# Altium PCB Motherboard.PcbDoc (part 1 of 2)
Units mm, origin at the board's own origin, x right, y up, seen from the top; angles counter-clockwise.
Board outline 131 x 71 mm, 4 copper layers (Top Layer, Power, Ground, Bottom Layer), stack 0.603 mm thick; 135 components, 79 nets, 354 pads, 162 vias.
Unrouted connection lines stored in the file: 81.
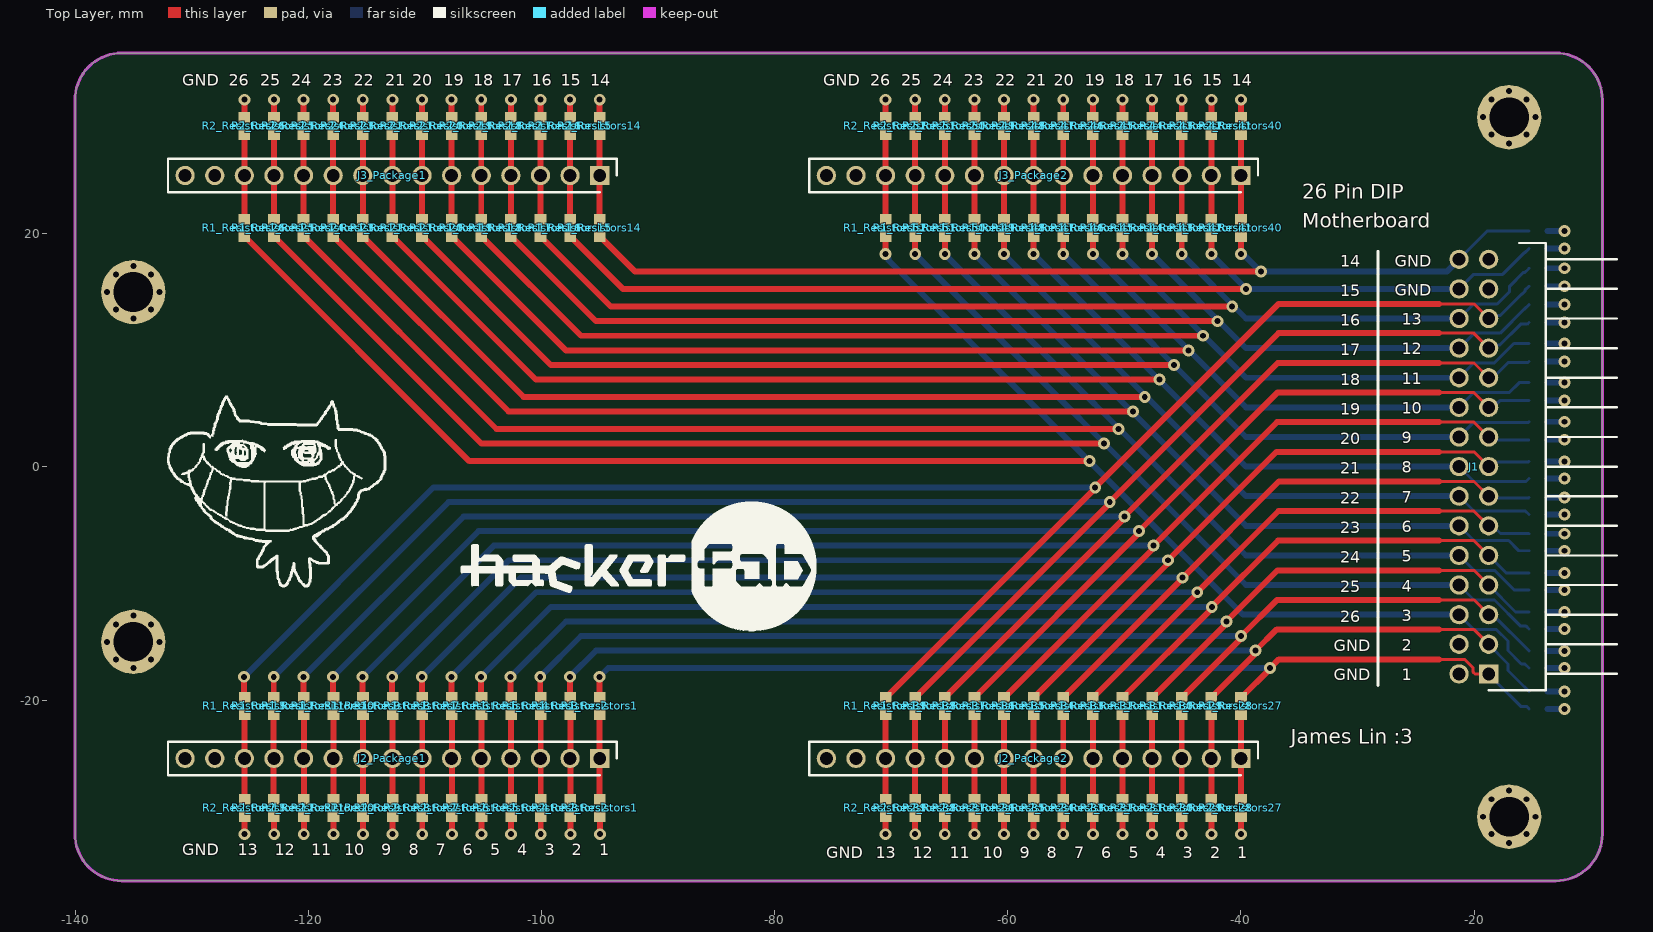
[diagram p0: Top Layer view]
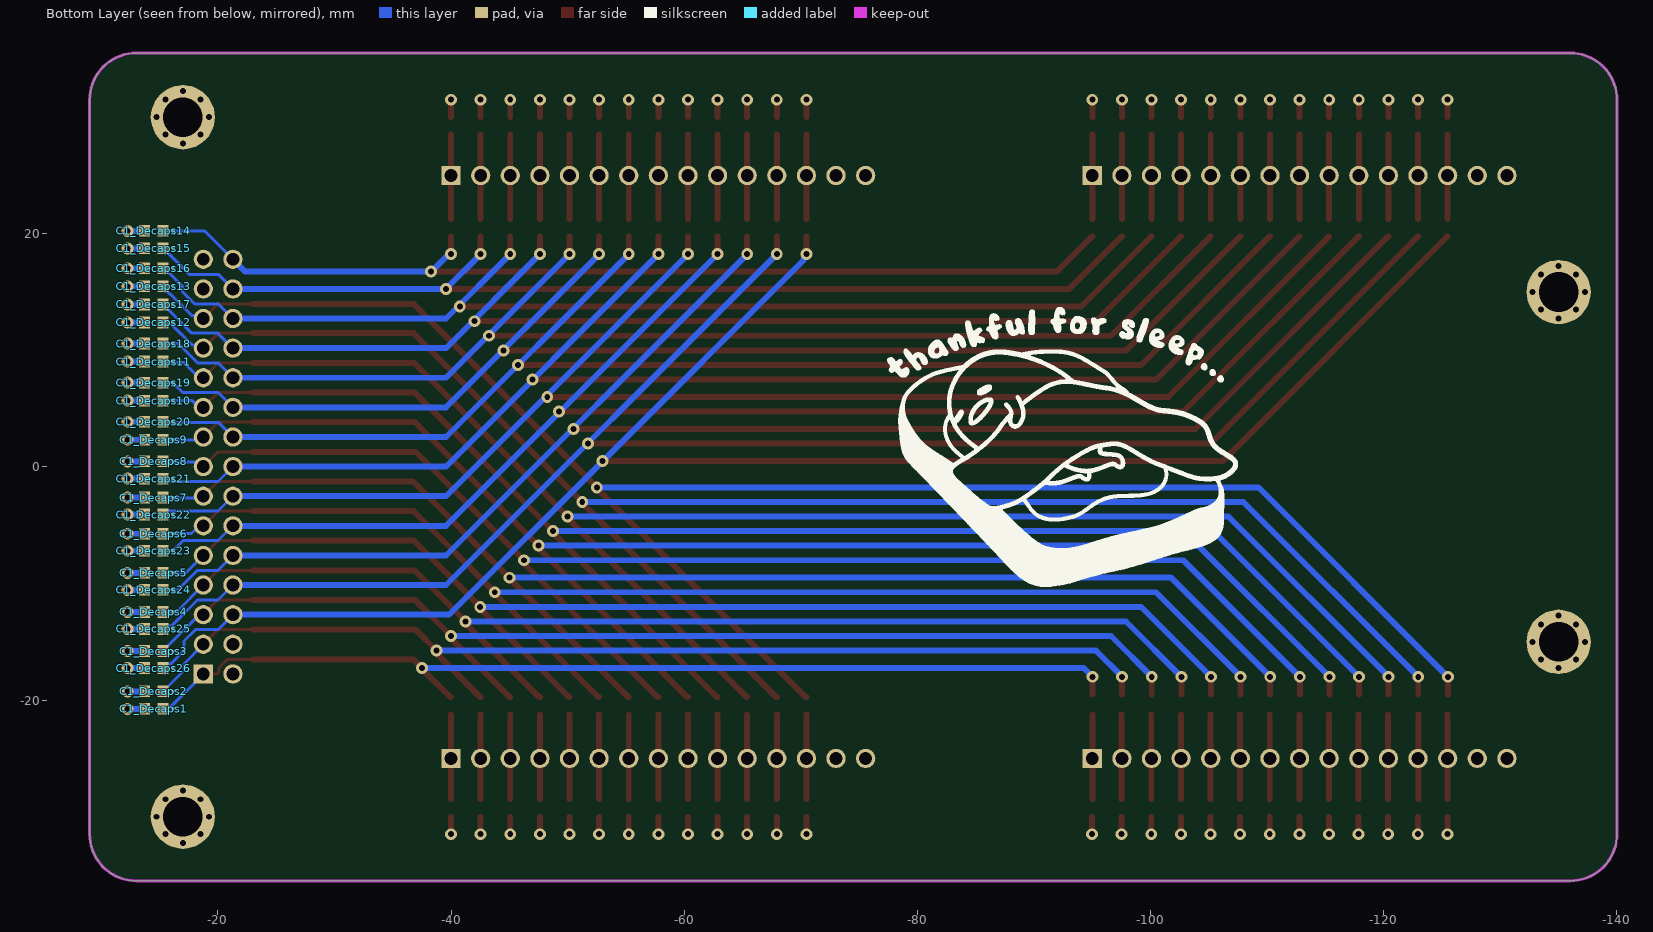
[diagram p1: Bottom Layer view, seen from below]
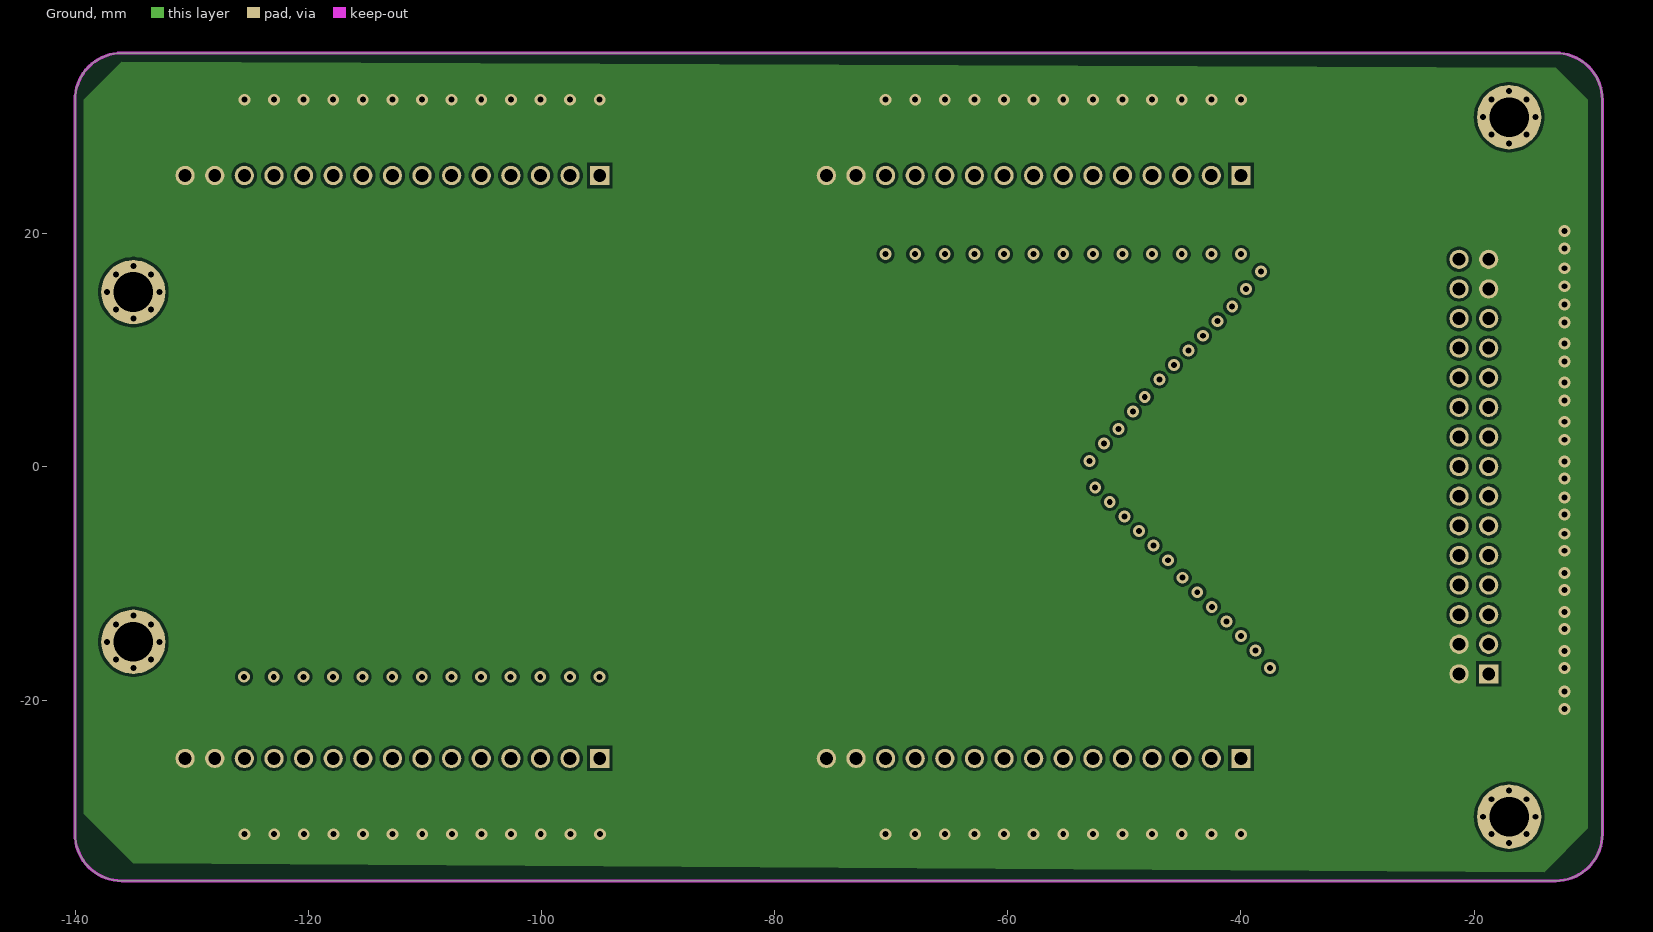
[diagram p2: Ground]
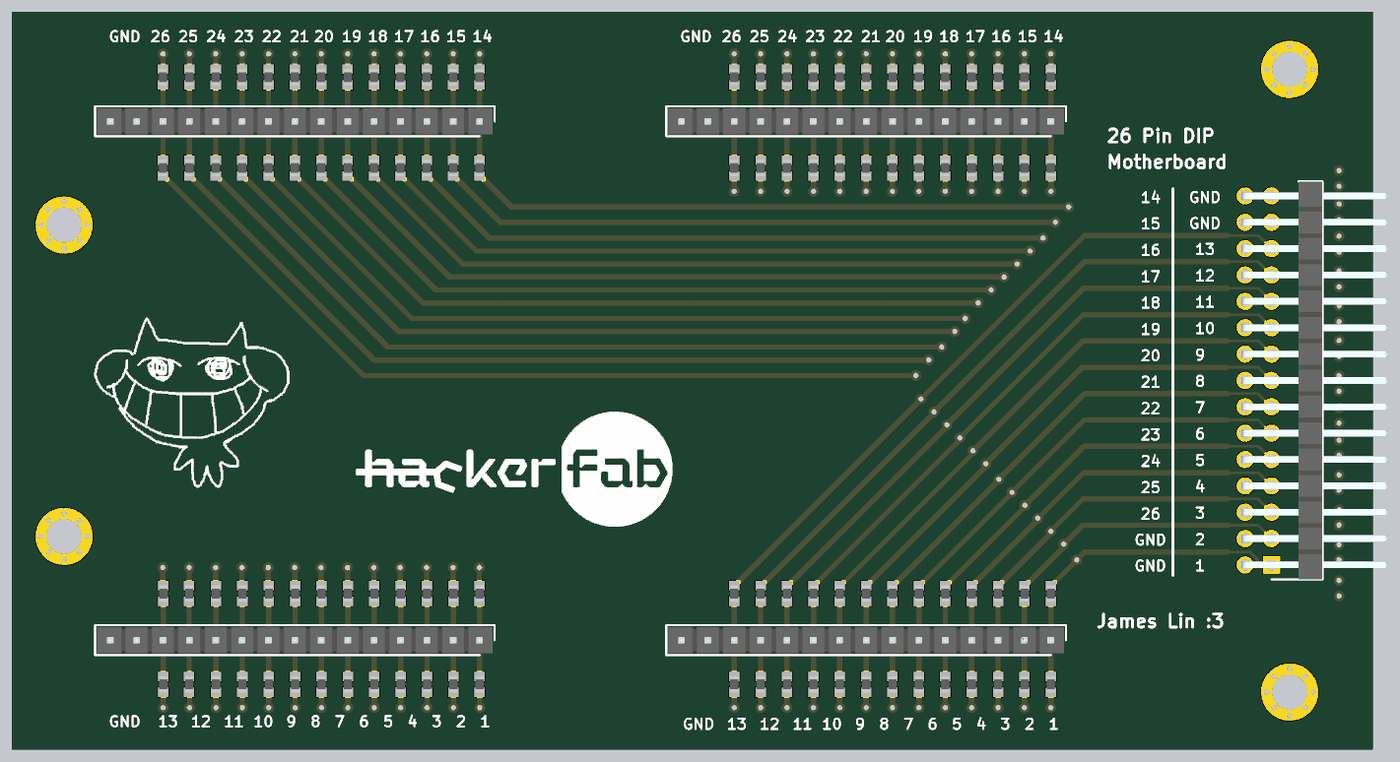
[diagram p4: 3D render of the assembled board from above, using the file's embedded part models]
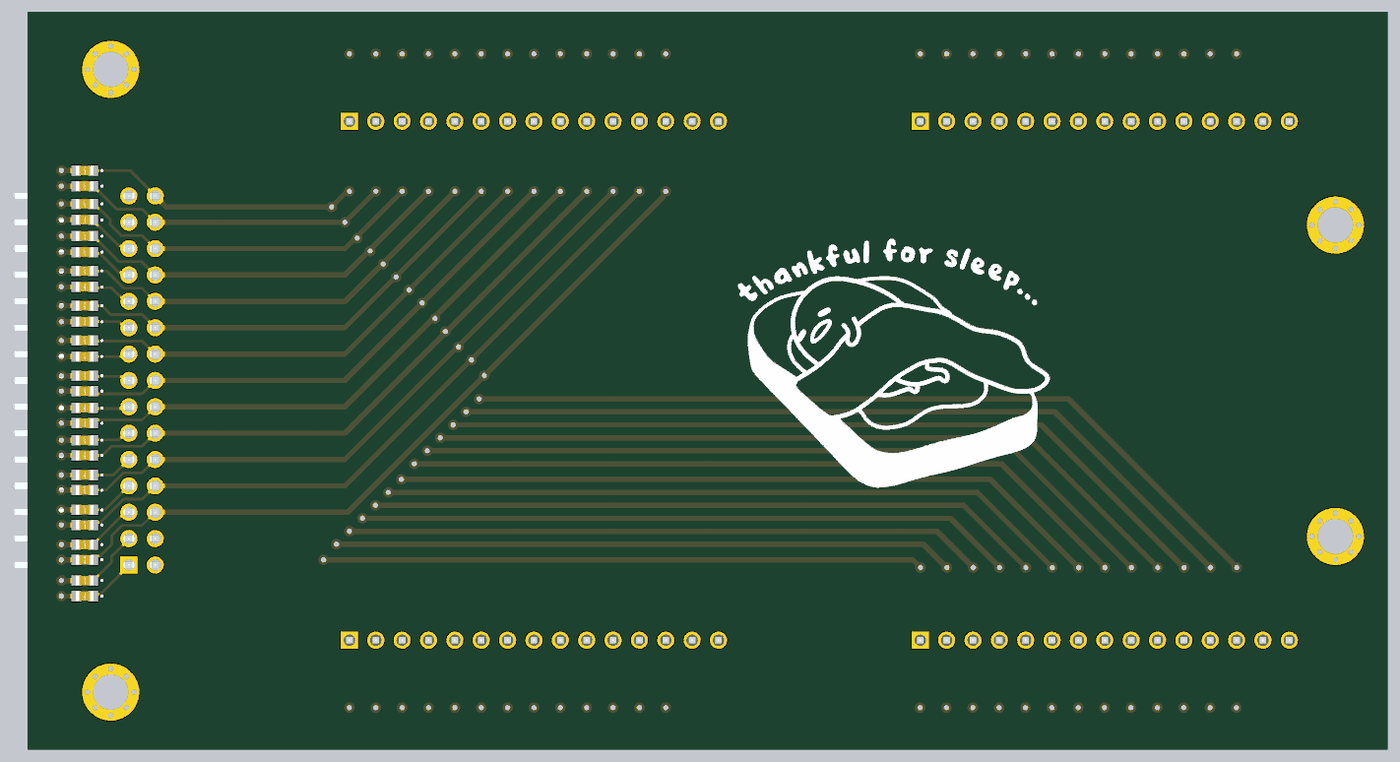
[diagram p5: 3D render of the assembled board from below, using the file's embedded part models]

## Layer stack, top to bottom
Top Solder: solder mask 0.0102, Solder Resist, Dk 3.5
Top Layer: signal copper 0.0356
Dielectric 2: prepreg 0.0711, PP-006, Dk 4.1
Power: signal copper 0.035
Dielectric 1: dielectric 0.32, FR-4, Dk 4.8
Ground: signal copper 0.035
Dielectric 3: prepreg 0.0711, PP-006, Dk 4.1
Bottom Layer: signal copper 0.0356
Bottom Solder: solder mask 0.0102, Solder Resist, Dk 3.5

## Board outline
-136,-35.5 cw(c-136,-31.5) -140,-31.5 -140,31.5 cw(c-136,31.5) -136,35.5 -13,35.5 cw(c-13,31.5) -9,31.5 -9,-31.5 cw(c-13,-31.5) -13,-35.5

## Design rules (kind name [scope] priority, off if disabled: settings)
Clearance [All] p1: gap=0.254 ignorepadtopadclearanceinfootprint=FALSE
PolygonConnect [All] p1: connectstyle=Direct reliefconductorwidth=0.254 reliefentries=4 polygonreliefangle="90 Angle" airgapwidth=0.254
RoomDefinition Package1 [InComponentClass('Package1')] p1: confinementstyle=ConfineIn formatcopy=TRUE lockcomponents=TRUE outline -132.75,-27.18 -93,-27.18 -93,27.07 -132.75,27.07
RoomDefinition Resistors52 [InComponentClass('Resistors52')] p2: confinementstyle=ConfineIn formatcopy=TRUE lockcomponents=FALSE outline -69.73,31.18 -71.23,31.18 -71.23,18.68 -69.73,18.68
RoomDefinition Resistors48 [InComponentClass('Resistors48')] p3: confinementstyle=ConfineIn formatcopy=TRUE lockcomponents=FALSE outline -59.57,31.18 -61.07,31.18 -61.07,18.68 -59.57,18.68
RoomDefinition Resistors26 [InComponentClass('Resistors26')] p4: confinementstyle=ConfineIn formatcopy=FALSE lockcomponents=FALSE outline -124.73,31.18 -126.23,31.18 -126.23,18.68 -124.73,18.68
RoomDefinition Resistors25 [InComponentClass('Resistors25')] p5: confinementstyle=ConfineIn formatcopy=FALSE lockcomponents=FALSE outline -122.19,31.18 -123.69,31.18 -123.69,18.68 -122.19,18.68
RoomDefinition Resistors24 [InComponentClass('Resistors24')] p6: confinementstyle=ConfineIn formatcopy=FALSE lockcomponents=FALSE outline -119.65,31.18 -121.15,31.18 -121.15,18.68 -119.65,18.68
RoomDefinition Resistors23 [InComponentClass('Resistors23')] p7: confinementstyle=ConfineIn formatcopy=FALSE lockcomponents=FALSE outline -117.11,31.18 -118.61,31.18 -118.61,18.68 -117.11,18.68
RoomDefinition Resistors22 [InComponentClass('Resistors22')] p8: confinementstyle=ConfineIn formatcopy=FALSE lockcomponents=FALSE outline -114.57,31.18 -116.07,31.18 -116.07,18.68 -114.57,18.68
RoomDefinition Resistors21 [InComponentClass('Resistors21')] p9: confinementstyle=ConfineIn formatcopy=FALSE lockcomponents=FALSE outline -112.03,31.18 -113.53,31.18 -113.53,18.68 -112.03,18.68
RoomDefinition Resistors20 [InComponentClass('Resistors20')] p10: confinementstyle=ConfineIn formatcopy=FALSE lockcomponents=FALSE outline -109.49,31.18 -110.99,31.18 -110.99,18.68 -109.49,18.68
RoomDefinition Resistors19 [InComponentClass('Resistors19')] p11: confinementstyle=ConfineIn formatcopy=FALSE lockcomponents=FALSE outline -106.95,31.18 -108.45,31.18 -108.45,18.68 -106.95,18.68
RoomDefinition Resistors18 [InComponentClass('Resistors18')] p12: confinementstyle=ConfineIn formatcopy=FALSE lockcomponents=FALSE outline -104.41,31.18 -105.91,31.18 -105.91,18.68 -104.41,18.68
RoomDefinition Resistors17 [InComponentClass('Resistors17')] p13: confinementstyle=ConfineIn formatcopy=FALSE lockcomponents=FALSE outline -101.87,31.18 -103.37,31.18 -103.37,18.68 -101.87,18.68
RoomDefinition Resistors16 [InComponentClass('Resistors16')] p14: confinementstyle=ConfineIn formatcopy=FALSE lockcomponents=FALSE outline -99.33,31.18 -100.83,31.18 -100.83,18.68 -99.33,18.68
RoomDefinition Resistors15 [InComponentClass('Resistors15')] p15: confinementstyle=ConfineIn formatcopy=FALSE lockcomponents=FALSE outline -96.79,31.18 -98.29,31.18 -98.29,18.68 -96.79,18.68
RoomDefinition Resistors14 [InComponentClass('Resistors14')] p16: confinementstyle=ConfineIn formatcopy=FALSE lockcomponents=FALSE outline -94.25,31.18 -95.75,31.18 -95.75,18.68 -94.25,18.68
RoomDefinition Resistors2 [InComponentClass('Resistors2')] p17: confinementstyle=ConfineIn formatcopy=FALSE lockcomponents=FALSE outline -98.269,-31.18 -96.769,-31.18 -96.769,-18.68 -98.269,-18.68
RoomDefinition Resistors3 [InComponentClass('Resistors3')] p18: confinementstyle=ConfineIn formatcopy=FALSE lockcomponents=FALSE outline -100.809,-31.18 -99.309,-31.18 -99.309,-18.68 -100.809,-18.68
RoomDefinition Resistors4 [InComponentClass('Resistors4')] p19: confinementstyle=ConfineIn formatcopy=FALSE lockcomponents=FALSE outline -103.349,-31.18 -101.849,-31.18 -101.849,-18.68 -103.349,-18.68
RoomDefinition Resistors5 [InComponentClass('Resistors5')] p20: confinementstyle=ConfineIn formatcopy=FALSE lockcomponents=FALSE outline -105.889,-31.18 -104.389,-31.18 -104.389,-18.68 -105.889,-18.68
RoomDefinition Resistors6 [InComponentClass('Resistors6')] p21: confinementstyle=ConfineIn formatcopy=FALSE lockcomponents=FALSE outline -108.429,-31.18 -106.929,-31.18 -106.929,-18.68 -108.429,-18.68
RoomDefinition Resistors11 [InComponentClass('Resistors11')] p22: confinementstyle=ConfineIn formatcopy=FALSE lockcomponents=FALSE outline -121.129,-31.18 -119.629,-31.18 -119.629,-18.68 -121.129,-18.68
RoomDefinition Resistors13 [InComponentClass('Resistors13')] p23: confinementstyle=ConfineIn formatcopy=FALSE lockcomponents=FALSE outline -126.209,-31.18 -124.709,-31.18 -124.709,-18.68 -126.209,-18.68
RoomDefinition Resistors7 [InComponentClass('Resistors7')] p24: confinementstyle=ConfineIn formatcopy=FALSE lockcomponents=FALSE outline -110.969,-31.18 -109.469,-31.18 -109.469,-18.68 -110.969,-18.68
RoomDefinition Resistors8 [InComponentClass('Resistors8')] p25: confinementstyle=ConfineIn formatcopy=FALSE lockcomponents=FALSE outline -113.509,-31.18 -112.009,-31.18 -112.009,-18.68 -113.509,-18.68
RoomDefinition Resistors9 [InComponentClass('Resistors9')] p26: confinementstyle=ConfineIn formatcopy=FALSE lockcomponents=FALSE outline -116.049,-31.18 -114.549,-31.18 -114.549,-18.68 -116.049,-18.68
RoomDefinition Resistors10 [InComponentClass('Resistors10')] p27: confinementstyle=ConfineIn formatcopy=FALSE lockcomponents=FALSE outline -118.589,-31.18 -117.089,-31.18 -117.089,-18.68 -118.589,-18.68
RoomDefinition Resistors12 [InComponentClass('Resistors12')] p28: confinementstyle=ConfineIn formatcopy=FALSE lockcomponents=FALSE outline -123.717,-31.18 -122.217,-31.18 -122.217,-18.68 -123.717,-18.68
RoomDefinition Resistors1 [InComponentClass('Resistors1')] p29: confinementstyle=ConfineIn formatcopy=FALSE lockcomponents=FALSE outline -95.75,-31.18 -94.25,-31.18 -94.25,-18.68 -95.75,-18.68
RoomDefinition Resistors51 [InComponentClass('Resistors51')] p30: confinementstyle=ConfineIn formatcopy=TRUE lockcomponents=FALSE outline -67.19,31.18 -68.69,31.18 -68.69,18.68 -67.19,18.68
RoomDefinition Resistors50 [InComponentClass('Resistors50')] p31: confinementstyle=ConfineIn formatcopy=TRUE lockcomponents=FALSE outline -64.65,31.18 -66.15,31.18 -66.15,18.68 -64.65,18.68
RoomDefinition Resistors49 [InComponentClass('Resistors49')] p32: confinementstyle=ConfineIn formatcopy=TRUE lockcomponents=FALSE outline -62.11,31.18 -63.61,31.18 -63.61,18.68 -62.11,18.68
RoomDefinition Resistors47 [InComponentClass('Resistors47')] p33: confinementstyle=ConfineIn formatcopy=TRUE lockcomponents=FALSE outline -57.03,31.18 -58.53,31.18 -58.53,18.68 -57.03,18.68
RoomDefinition Resistors46 [InComponentClass('Resistors46')] p34: confinementstyle=ConfineIn formatcopy=TRUE lockcomponents=FALSE outline -54.49,31.18 -55.99,31.18 -55.99,18.68 -54.49,18.68
RoomDefinition Resistors45 [InComponentClass('Resistors45')] p35: confinementstyle=ConfineIn formatcopy=TRUE lockcomponents=FALSE outline -51.95,31.18 -53.45,31.18 -53.45,18.68 -51.95,18.68
RoomDefinition Resistors44 [InComponentClass('Resistors44')] p36: confinementstyle=ConfineIn formatcopy=TRUE lockcomponents=FALSE outline -49.41,31.18 -50.91,31.18 -50.91,18.68 -49.41,18.68
RoomDefinition Resistors43 [InComponentClass('Resistors43')] p37: confinementstyle=ConfineIn formatcopy=TRUE lockcomponents=FALSE outline -46.87,31.18 -48.37,31.18 -48.37,18.68 -46.87,18.68
RoomDefinition Resistors42 [InComponentClass('Resistors42')] p38: confinementstyle=ConfineIn formatcopy=TRUE lockcomponents=FALSE outline -44.33,31.18 -45.83,31.18 -45.83,18.68 -44.33,18.68
RoomDefinition Resistors41 [InComponentClass('Resistors41')] p39: confinementstyle=ConfineIn formatcopy=TRUE lockcomponents=FALSE outline -41.79,31.18 -43.29,31.18 -43.29,18.68 -41.79,18.68
RoomDefinition Resistors40 [InComponentClass('Resistors40')] p40: confinementstyle=ConfineIn formatcopy=FALSE lockcomponents=FALSE outline -39.25,31.18 -40.75,31.18 -40.75,18.68 -39.25,18.68
RoomDefinition Resistors39 [InComponentClass('Resistors39')] p41: confinementstyle=ConfineIn formatcopy=FALSE lockcomponents=FALSE outline -71.23,-31.18 -69.73,-31.18 -69.73,-18.68 -71.23,-18.68
RoomDefinition Resistors38 [InComponentClass('Resistors38')] p42: confinementstyle=ConfineIn formatcopy=FALSE lockcomponents=FALSE outline -68.69,-31.18 -67.19,-31.18 -67.19,-18.68 -68.69,-18.68
RoomDefinition Resistors37 [InComponentClass('Resistors37')] p43: confinementstyle=ConfineIn formatcopy=FALSE lockcomponents=FALSE outline -66.15,-31.18 -64.65,-31.18 -64.65,-18.68 -66.15,-18.68
RoomDefinition Resistors36 [InComponentClass('Resistors36')] p44: confinementstyle=ConfineIn formatcopy=FALSE lockcomponents=FALSE outline -63.61,-31.18 -62.11,-31.18 -62.11,-18.68 -63.61,-18.68
RoomDefinition Resistors35 [InComponentClass('Resistors35')] p45: confinementstyle=ConfineIn formatcopy=FALSE lockcomponents=FALSE outline -61.07,-31.18 -59.57,-31.18 -59.57,-18.68 -61.07,-18.68
RoomDefinition Resistors34 [InComponentClass('Resistors34')] p46: confinementstyle=ConfineIn formatcopy=FALSE lockcomponents=FALSE outline -58.53,-31.18 -57.03,-31.18 -57.03,-18.68 -58.53,-18.68
RoomDefinition Resistors33 [InComponentClass('Resistors33')] p47: confinementstyle=ConfineIn formatcopy=FALSE lockcomponents=FALSE outline -55.99,-31.18 -54.49,-31.18 -54.49,-18.68 -55.99,-18.68
RoomDefinition Resistors32 [InComponentClass('Resistors32')] p48: confinementstyle=ConfineIn formatcopy=FALSE lockcomponents=FALSE outline -53.45,-31.18 -51.95,-31.18 -51.95,-18.68 -53.45,-18.68
RoomDefinition Resistors31 [InComponentClass('Resistors31')] p49: confinementstyle=ConfineIn formatcopy=FALSE lockcomponents=FALSE outline -50.91,-31.18 -49.41,-31.18 -49.41,-18.68 -50.91,-18.68
RoomDefinition Resistors30 [InComponentClass('Resistors30')] p50: confinementstyle=ConfineIn formatcopy=FALSE lockcomponents=FALSE outline -48.37,-31.18 -46.87,-31.18 -46.87,-18.68 -48.37,-18.68
RoomDefinition Resistors29 [InComponentClass('Resistors29')] p51: confinementstyle=ConfineIn formatcopy=FALSE lockcomponents=FALSE outline -45.83,-31.18 -44.33,-31.18 -44.33,-18.68 -45.83,-18.68
RoomDefinition Resistors28 [InComponentClass('Resistors28')] p52: confinementstyle=ConfineIn formatcopy=FALSE lockcomponents=FALSE outline -43.29,-31.18 -41.79,-31.18 -41.79,-18.68 -43.29,-18.68
RoomDefinition Resistors27 [InComponentClass('Resistors27')] p53: confinementstyle=ConfineIn formatcopy=FALSE lockcomponents=FALSE outline -40.75,-31.18 -39.25,-31.18 -39.25,-18.68 -40.75,-18.68
RoomDefinition Package2 [InComponentClass('Package2')] p54: confinementstyle=ConfineIn formatcopy=TRUE lockcomponents=TRUE outline -77.75,-27.18 -38,-27.18 -38,27.07 -77.75,27.07
RoutingVias [All] p1: holewidth=0.711 width=1.27 viastyle="Through Hole" minholewidth=0 minwidth=0 maxholewidth=15 maxwidth=15
SolderMaskExpansion [All] p1: expansion=0.102 istentingtop=FALSE
SupplyNets "Schematic Supply Nets" [InNet('GND')] p1: voltage=0.000
Width [All] p1: maxlimit=0.508 minlimit=0.254 preferedwidth=0.254
30 further rules are at their usual default settings.

## Classes and differential pairs
component class Resistors52: R1_Resistors52 R2_Resistors52
component class Resistors51: R1_Resistors51 R2_Resistors51
component class Resistors49: R1_Resistors49 R2_Resistors49
component class Resistors46: R1_Resistors46 R2_Resistors46
component class Resistors43: R1_Resistors43 R2_Resistors43
component class Resistors41: R1_Resistors41 R2_Resistors41
channel class Decaps: Decaps1 Decaps2 Decaps3 Decaps4 Decaps5 Decaps6 Decaps7 Decaps8 Decaps9 Decaps10 Decaps11 Decaps12 Decaps13 Decaps14 Decaps15 Decaps16 Decaps17 Decaps18 Decaps19 Decaps20 Decaps21 Decaps22 Decaps23 Decaps24 Decaps25 Decaps26
net class Decap_In[1..26]: Decap_In1 Decap_In2 Decap_In3 Decap_In4 Decap_In5 Decap_In6 Decap_In7 Decap_In8 Decap_In9 Decap_In10 Decap_In11 Decap_In12 Decap_In13 Decap_In14 Decap_In15 Decap_In16 Decap_In17 Decap_In18 Decap_In19 Decap_In20 Decap_In21 Decap_In22 Decap_In23 Decap_In24 Decap_In25 Decap_In26
component class Decaps26: C1_Decaps26
component class Decaps25: C1_Decaps25
component class Decaps24: C1_Decaps24
component class Decaps23: C1_Decaps23
component class Decaps22: C1_Decaps22
component class Decaps21: C1_Decaps21
component class Decaps20: C1_Decaps20
component class Decaps19: C1_Decaps19
component class Decaps18: C1_Decaps18
component class Decaps17: C1_Decaps17
component class Decaps16: C1_Decaps16
component class Decaps15: C1_Decaps15
component class Decaps14: C1_Decaps14
component class Decaps13: C1_Decaps13
component class Decaps12: C1_Decaps12
component class Decaps11: C1_Decaps11
component class Decaps10: C1_Decaps10
component class Decaps9: C1_Decaps9
component class Decaps8: C1_Decaps8
component class Decaps7: C1_Decaps7
component class Decaps6: C1_Decaps6
component class Decaps5: C1_Decaps5
component class Decaps4: C1_Decaps4
component class Decaps3: C1_Decaps3
component class Decaps2: C1_Decaps2
component class Decaps1: C1_Decaps1
component class Resistors6: R1_Resistors6 R2_Resistors6
component class Resistors5: R1_Resistors5 R2_Resistors5
component class Resistors4: R1_Resistors4 R2_Resistors4
component class Resistors3: R1_Resistors3 R2_Resistors3
component class Resistors2: R1_Resistors2 R2_Resistors2
component class Resistors1: R1_Resistors1 R2_Resistors1
channel class "Package Sockets": Package1 Package2
component class Resistors48: m R1_Resistors48 R2_Resistors48
component class Resistors47: m R1_Resistors47 R2_Resistors47
component class Resistors50: m R1_Resistors50 R2_Resistors50
component class Resistors45: m R1_Resistors45 R2_Resistors45
component class Resistors44: m R1_Resistors44 R2_Resistors44
component class Resistors39: m R1_Resistors39 R2_Resistors39
component class Resistors42: m R1_Resistors42 R2_Resistors42
component class Resistors40: m R1_Resistors40 R2_Resistors40
component class Resistors35: m R1_Resistors35 R2_Resistors35
component class Resistors38: m R1_Resistors38 R2_Resistors38
component class Resistors37: m R1_Resistors37 R2_Resistors37
component class Resistors36: m R1_Resistors36 R2_Resistors36
component class Resistors31: m R1_Resistors31 R2_Resistors31
component class Resistors30: m R1_Resistors30 R2_Resistors30
component class Resistors33: m R1_Resistors33 R2_Resistors33
component class Resistors28: m R1_Resistors28 R2_Resistors28
component class Resistors27: m R1_Resistors27 R2_Resistors27
component class Resistors34: m R1_Resistors34 R2_Resistors34
component class Resistors32: m R1_Resistors32 R2_Resistors32
component class Package2: J2_Package2 J3_Package2
component class Package1: J2_Package1 J3_Package1
channel class Resistors: Resistors1 Resistors2 Resistors3 Resistors4 Resistors5 Resistors6 Resistors7 Resistors8 Resistors9 Resistors10 Resistors11 Resistors12 Resistors13 Resistors14 Resistors15 Resistors16 Resistors17 Resistors18 Resistors19 Resistors20 Resistors21 Resistors22 Resistors23 Resistors24 Resistors25 Resistors26 Resistors27 Resistors28 Resistors29 Resistors30 Resistors31 Resistors32 Resistors33 Resistors34 Resistors35 Resistors36 Resistors37 Resistors38 Resistors39 Resistors40 Resistors41 Resistors42 Resistors43 Resistors44 Resistors45 Resistors46 Resistors47 Resistors48 Resistors49 Resistors50 Resistors51 Resistors52
component class Resistors29: m R1_Resistors29 R2_Resistors29
component class Resistors26: m R1_Resistors26 R2_Resistors26
component class Resistors25: m R1_Resistors25 R2_Resistors25
component class Resistors24: m R1_Resistors24 R2_Resistors24
component class Resistors23: m R1_Resistors23 R2_Resistors23
component class Resistors22: m R1_Resistors22 R2_Resistors22
component class Resistors21: m R1_Resistors21 R2_Resistors21
component class Resistors20: m R1_Resistors20 R2_Resistors20
component class Resistors19: m R1_Resistors19 R2_Resistors19
component class Resistors18: m R1_Resistors18 R2_Resistors18
component class Resistors17: m R1_Resistors17 R2_Resistors17
component class Resistors16: m R1_Resistors16 R2_Resistors16
component class Resistors15: m R1_Resistors15 R2_Resistors15
component class Resistors14: m R1_Resistors14 R2_Resistors14
component class Resistors13: m R1_Resistors13 R2_Resistors13
component class Resistors12: m R1_Resistors12 R2_Resistors12
component class Resistors11: m R1_Resistors11 R2_Resistors11
component class Resistors10: m R1_Resistors10 R2_Resistors10
component class Resistors9: m R1_Resistors9 R2_Resistors9
component class Resistors8: m R1_Resistors8 R2_Resistors8
component class Resistors7: m R1_Resistors7 R2_Resistors7
component class "Analyzer Connector": J1

## Components (designator, comment, footprint, x,y, rotation, side; value= is the part's Value field where it differs from the comment)
C1_Decaps1 "0.1 uF" C0603 -14.5,-20.75 r0 bottom (schematic designator C1)
C1_Decaps2 "0.1 uF" C0603 -14.5,-19.25 r0 bottom (schematic designator C1)
C1_Decaps3 "0.1 uF" C0603 -14.5,-15.792 r0 bottom (schematic designator C1)
C1_Decaps4 "0.1 uF" C0603 -14.5,-12.438 r0 bottom (schematic designator C1)
C1_Decaps5 "0.1 uF" C0603 -14.5,-9.083 r0 bottom (schematic designator C1)
C1_Decaps6 "0.1 uF" C0603 -14.5,-5.729 r0 bottom (schematic designator C1)
C1_Decaps7 "0.1 uF" C0603 -14.5,-2.625 r0 bottom (schematic designator C1)
C1_Decaps8 "0.1 uF" C0603 -14.5,0.479 r0 bottom (schematic designator C1)
C1_Decaps9 "0.1 uF" C0603 -14.5,2.333 r0 bottom (schematic designator C1)
C1_Decaps10 "0.1 uF" C0603 -14.5,5.687 r0 bottom (schematic designator C1)
C1_Decaps11 "0.1 uF" C0603 -14.5,9.042 r0 bottom (schematic designator C1)
C1_Decaps12 "0.1 uF" C0603 -14.5,12.396 r0 bottom (schematic designator C1)
C1_Decaps13 "0.1 uF" C0603 -14.5,15.5 r0 bottom (schematic designator C1)
C1_Decaps14 "0.1 uF" C0603 -14.5,20.25 r0 bottom (schematic designator C1)
C1_Decaps15 "0.1 uF" C0603 -14.5,18.75 r0 bottom (schematic designator C1)
C1_Decaps16 "0.1 uF" C0603 -14.5,17.042 r0 bottom (schematic designator C1)
C1_Decaps17 "0.1 uF" C0603 -14.5,13.937 r0 bottom (schematic designator C1)
C1_Decaps18 "0.1 uF" C0603 -14.5,10.583 r0 bottom (schematic designator C1)
C1_Decaps19 "0.1 uF" C0603 -14.5,7.229 r0 bottom (schematic designator C1)
C1_Decaps20 "0.1 uF" C0603 -14.5,3.875 r0 bottom (schematic designator C1)
C1_Decaps21 "0.1 uF" C0603 -14.5,-1 r0 bottom (schematic designator C1)
C1_Decaps22 "0.1 uF" C0603 -14.5,-4.083 r0 bottom (schematic designator C1)
C1_Decaps23 "0.1 uF" C0603 -14.5,-7.187 r0 bottom (schematic designator C1)
C1_Decaps24 "0.1 uF" C0603 -14.5,-10.542 r0 bottom (schematic designator C1)
C1_Decaps25 "0.1 uF" C0603 -14.5,-13.896 r0 bottom (schematic designator C1)
C1_Decaps26 "0.1 uF" C0603 -14.5,-17.25 r0 bottom (schematic designator C1)
J1 "0717640130" HDRRA30W64P254_2X15_3810X229X533P -18.75,-17.75 r270 top locked
J2_Package1 "PH1-15-UA" HDRV15W64P0X254_1X15_3810X249X886P -95,-25 r180 top locked (schematic designator J2)
J2_Package2 "PH1-15-UA" HDRV15W64P0X254_1X15_3810X249X886P -40,-25 r180 top locked (schematic designator J2)
J3_Package1 "PH1-15-UA" HDRV15W64P0X254_1X15_3810X249X886P -95,25 r180 top locked (schematic designator J3)
J3_Package2 "PH1-15-UA" HDRV15W64P0X254_1X15_3810X249X886P -40,25 r180 top locked (schematic designator J3)
R1_Resistors1 "1k" RESC1608X55N -95,-20.5 r270 top (schematic designator R1)
R1_Resistors2 "1k" RESC1608X55N -97.519,-20.5 r270 top (schematic designator R1)
R1_Resistors3 "1k" RESC1608X55N -100.059,-20.5 r270 top (schematic designator R1)
R1_Resistors4 "1k" RESC1608X55N -102.599,-20.5 r270 top (schematic designator R1)
R1_Resistors5 "1k" RESC1608X55N -105.139,-20.5 r270 top (schematic designator R1)
R1_Resistors6 "1k" RESC1608X55N -107.679,-20.5 r270 top (schematic designator R1)
R1_Resistors7 "1k" RESC1608X55N -110.219,-20.5 r270 top (schematic designator R1)
R1_Resistors8 "1k" RESC1608X55N -112.759,-20.5 r270 top (schematic designator R1)
R1_Resistors9 "1k" RESC1608X55N -115.299,-20.5 r270 top (schematic designator R1)
R1_Resistors10 "1k" RESC1608X55N -117.839,-20.5 r270 top (schematic designator R1)
R1_Resistors11 "1k" RESC1608X55N -120.379,-20.5 r270 top (schematic designator R1)
R1_Resistors12 "1k" RESC1608X55N -122.967,-20.5 r270 top (schematic designator R1)
R1_Resistors13 "1k" RESC1608X55N -125.459,-20.5 r270 top (schematic designator R1)
R1_Resistors14 "1k" RESC1608X55N -95,20.5 r90 top (schematic designator R1)
R1_Resistors15 "1k" RESC1608X55N -97.54,20.5 r90 top (schematic designator R1)
R1_Resistors16 "1k" RESC1608X55N -100.08,20.5 r90 top (schematic designator R1)
R1_Resistors17 "1k" RESC1608X55N -102.62,20.5 r90 top (schematic designator R1)
R1_Resistors18 "1k" RESC1608X55N -105.16,20.5 r90 top (schematic designator R1)
R1_Resistors19 "1k" RESC1608X55N -107.7,20.5 r90 top (schematic designator R1)
R1_Resistors20 "1k" RESC1608X55N -110.24,20.5 r90 top (schematic designator R1)
R1_Resistors21 "1k" RESC1608X55N -112.78,20.5 r90 top (schematic designator R1)
R1_Resistors22 "1k" RESC1608X55N -115.32,20.5 r90 top (schematic designator R1)
R1_Resistors23 "1k" RESC1608X55N -117.86,20.5 r90 top (schematic designator R1)
R1_Resistors24 "1k" RESC1608X55N -120.4,20.5 r90 top (schematic designator R1)
R1_Resistors25 "1k" RESC1608X55N -122.94,20.5 r90 top (schematic designator R1)
R1_Resistors26 "1k" RESC1608X55N -125.48,20.5 r90 top (schematic designator R1)
R1_Resistors27 "1k" RESC1608X55N -40,-20.5 r270 top (schematic designator R1)
R1_Resistors28 "1k" RESC1608X55N -42.54,-20.5 r270 top (schematic designator R1)
R1_Resistors29 "1k" RESC1608X55N -45.08,-20.5 r270 top (schematic designator R1)
R1_Resistors30 "1k" RESC1608X55N -47.62,-20.5 r270 top (schematic designator R1)
R1_Resistors31 "1k" RESC1608X55N -50.16,-20.5 r270 top (schematic designator R1)
R1_Resistors32 "1k" RESC1608X55N -52.7,-20.5 r270 top (schematic designator R1)
R1_Resistors33 "1k" RESC1608X55N -55.24,-20.5 r270 top (schematic designator R1)
R1_Resistors34 "1k" RESC1608X55N -57.78,-20.5 r270 top (schematic designator R1)
R1_Resistors35 "1k" RESC1608X55N -60.32,-20.5 r270 top (schematic designator R1)
R1_Resistors36 "1k" RESC1608X55N -62.86,-20.5 r270 top (schematic designator R1)
R1_Resistors37 "1k" RESC1608X55N -65.4,-20.5 r270 top (schematic designator R1)
R1_Resistors38 "1k" RESC1608X55N -67.94,-20.5 r270 top (schematic designator R1)
R1_Resistors39 "1k" RESC1608X55N -70.48,-20.5 r270 top (schematic designator R1)
R1_Resistors40 "1k" RESC1608X55N -40,20.5 r90 top (schematic designator R1)
R1_Resistors41 "1k" RESC1608X55N -42.54,20.5 r90 top (schematic designator R1)
R1_Resistors42 "1k" RESC1608X55N -45.08,20.5 r90 top (schematic designator R1)
R1_Resistors43 "1k" RESC1608X55N -47.62,20.5 r90 top (schematic designator R1)
R1_Resistors44 "1k" RESC1608X55N -50.16,20.5 r90 top (schematic designator R1)
R1_Resistors45 "1k" RESC1608X55N -52.7,20.5 r90 top (schematic designator R1)
R1_Resistors46 "1k" RESC1608X55N -55.24,20.5 r90 top (schematic designator R1)
R1_Resistors47 "1k" RESC1608X55N -57.78,20.5 r90 top (schematic designator R1)
R1_Resistors48 "1k" RESC1608X55N -60.32,20.5 r90 top (schematic designator R1)
R1_Resistors49 "1k" RESC1608X55N -62.86,20.5 r90 top (schematic designator R1)
R1_Resistors50 "1k" RESC1608X55N -65.4,20.5 r90 top (schematic designator R1)
R1_Resistors51 "1k" RESC1608X55N -67.94,20.5 r90 top (schematic designator R1)
R1_Resistors52 "1k" RESC1608X55N -70.48,20.5 r90 top (schematic designator R1)
R2_Resistors1 "1k" RESC1608X55N -95,-29.25 r270 top (schematic designator R2)
R2_Resistors2 "1k" RESC1608X55N -97.519,-29.25 r270 top (schematic designator R2)
R2_Resistors3 "1k" RESC1608X55N -100.059,-29.25 r270 top (schematic designator R2)
R2_Resistors4 "1k" RESC1608X55N -102.599,-29.25 r270 top (schematic designator R2)
R2_Resistors5 "1k" RESC1608X55N -105.139,-29.25 r270 top (schematic designator R2)
R2_Resistors6 "1k" RESC1608X55N -107.679,-29.25 r270 top (schematic designator R2)
R2_Resistors7 "1k" RESC1608X55N -110.219,-29.25 r270 top (schematic designator R2)
R2_Resistors8 "1k" RESC1608X55N -112.759,-29.25 r270 top (schematic designator R2)
R2_Resistors9 "1k" RESC1608X55N -115.299,-29.25 r270 top (schematic designator R2)
R2_Resistors10 "1k" RESC1608X55N -117.839,-29.25 r270 top (schematic designator R2)
R2_Resistors11 "1k" RESC1608X55N -120.379,-29.25 r270 top (schematic designator R2)
R2_Resistors12 "1k" RESC1608X55N -122.967,-29.25 r270 top (schematic designator R2)
R2_Resistors13 "1k" RESC1608X55N -125.459,-29.25 r270 top (schematic designator R2)
R2_Resistors14 "1k" RESC1608X55N -95,29.25 r90 top (schematic designator R2)
R2_Resistors15 "1k" RESC1608X55N -97.54,29.25 r90 top (schematic designator R2)
R2_Resistors16 "1k" RESC1608X55N -100.08,29.25 r90 top (schematic designator R2)
R2_Resistors17 "1k" RESC1608X55N -102.62,29.25 r90 top (schematic designator R2)
R2_Resistors18 "1k" RESC1608X55N -105.16,29.25 r90 top (schematic designator R2)
R2_Resistors19 "1k" RESC1608X55N -107.7,29.25 r90 top (schematic designator R2)
R2_Resistors20 "1k" RESC1608X55N -110.24,29.25 r90 top (schematic designator R2)
R2_Resistors21 "1k" RESC1608X55N -112.78,29.25 r90 top (schematic designator R2)
R2_Resistors22 "1k" RESC1608X55N -115.32,29.25 r90 top (schematic designator R2)
R2_Resistors23 "1k" RESC1608X55N -117.86,29.25 r90 top (schematic designator R2)
R2_Resistors24 "1k" RESC1608X55N -120.4,29.25 r90 top (schematic designator R2)
R2_Resistors25 "1k" RESC1608X55N -122.94,29.25 r90 top (schematic designator R2)
R2_Resistors26 "1k" RESC1608X55N -125.48,29.25 r90 top (schematic designator R2)
R2_Resistors27 "1k" RESC1608X55N -40,-29.25 r270 top (schematic designator R2)
R2_Resistors28 "1k" RESC1608X55N -42.54,-29.25 r270 top (schematic designator R2)
R2_Resistors29 "1k" RESC1608X55N -45.08,-29.25 r270 top (schematic designator R2)
R2_Resistors30 "1k" RESC1608X55N -47.62,-29.25 r270 top (schematic designator R2)
R2_Resistors31 "1k" RESC1608X55N -50.16,-29.25 r270 top (schematic designator R2)
R2_Resistors32 "1k" RESC1608X55N -52.7,-29.25 r270 top (schematic designator R2)
R2_Resistors33 "1k" RESC1608X55N -55.24,-29.25 r270 top (schematic designator R2)
R2_Resistors34 "1k" RESC1608X55N -57.78,-29.25 r270 top (schematic designator R2)
R2_Resistors35 "1k" RESC1608X55N -60.32,-29.25 r270 top (schematic designator R2)
R2_Resistors36 "1k" RESC1608X55N -62.86,-29.25 r270 top (schematic designator R2)
R2_Resistors37 "1k" RESC1608X55N -65.4,-29.25 r270 top (schematic designator R2)
R2_Resistors38 "1k" RESC1608X55N -67.94,-29.25 r270 top (schematic designator R2)
R2_Resistors39 "1k" RESC1608X55N -70.48,-29.25 r270 top (schematic designator R2)
R2_Resistors40 "1k" RESC1608X55N -40,29.25 r90 top (schematic designator R2)
R2_Resistors41 "1k" RESC1608X55N -42.54,29.25 r90 top (schematic designator R2)
R2_Resistors42 "1k" RESC1608X55N -45.08,29.25 r90 top (schematic designator R2)
R2_Resistors43 "1k" RESC1608X55N -47.62,29.25 r90 top (schematic designator R2)
R2_Resistors44 "1k" RESC1608X55N -50.16,29.25 r90 top (schematic designator R2)
R2_Resistors45 "1k" RESC1608X55N -52.7,29.25 r90 top (schematic designator R2)
R2_Resistors46 "1k" RESC1608X55N -55.24,29.25 r90 top (schematic designator R2)
R2_Resistors47 "1k" RESC1608X55N -57.78,29.25 r90 top (schematic designator R2)
R2_Resistors48 "1k" RESC1608X55N -60.32,29.25 r90 top (schematic designator R2)
R2_Resistors49 "1k" RESC1608X55N -62.86,29.25 r90 top (schematic designator R2)
R2_Resistors50 "1k" RESC1608X55N -65.4,29.25 r90 top (schematic designator R2)
R2_Resistors51 "1k" RESC1608X55N -67.94,29.25 r90 top (schematic designator R2)
R2_Resistors52 "1k" RESC1608X55N -70.48,29.25 r90 top (schematic designator R2)

## Footprints (in the part's own frame and the unit in brackets; to place one, negate y for a bottom-side part, rotate by r counter-clockwise, add the part's x,y. Pads: shape width x height; smd on the part's side, far side on the other; paste and mask are expansions set on the pad)
C0603 [mm]
  rect 0.95x1 smd: 1(-0.8,0) 2(0.8,0)
  silkscreen extent -1.7,-0.05 -1.6,0.05, body extent -0.87,-0.48 0.88,0.47, height 0.95
HDRRA30W64P254_2X15_3810X229X533P [mm]
  rect 1.65x1.65 hole 1.1: 1(0,0)
  round 1.65 hole 1.1: 2(0,-2.54) 3(-2.54,0) 4(-2.54,-2.54) 5(-5.08,0) 6(-5.08,-2.54) 7(-7.62,0) 8(-7.62,-2.54) 9(-10.16,0) 10(-10.16,-2.54) 11(-12.7,0) 12(-12.7,-2.54) 13(-15.24,0) 14(-15.24,-2.54) 15(-17.78,0) 16(-17.78,-2.54) 17(-20.32,0) 18(-20.32,-2.54) 19(-22.86,0) 20(-22.86,-2.54) 21(-25.4,0) 22(-25.4,-2.54) 23(-27.94,0) 24(-27.94,-2.54) 25(-30.48,0) 26(-30.48,-2.54) 27(-33.02,0) 28(-33.02,-2.54) 29(-35.56,0) 30(-35.56,-2.54)
  silkscreen extent -36.95,0 1.39,11, body extent -36.96,-2.86 1.4,11.25, height 5.33
HDRV15W64P0X254_1X15_3810X249X886P [mm]
  rect 1.65x1.65 hole 1.1: 1(0,0)
  round 1.65 hole 1.1: 2(2.54,0) 3(5.08,0) 4(7.62,0) 5(10.16,0) 6(12.7,0) 7(15.24,0) 8(17.78,0) 9(20.32,0) 10(22.86,0) 11(25.4,0) 12(27.94,0) 13(30.48,0) 14(33.02,0) 15(35.56,0)
  silkscreen extent -1.46,-1.44 37.02,1.43, body extent -1.27,-1.24 36.83,1.24, height 8.86
RESC1608X55N [mm]
  rect 0.9x1 smd: 1(-0.75,0) 2(0.75,0)
  body extent -0.77,-0.4 0.78,0.4, height 0.45

## Part data
C1_Decaps1 C1_Decaps2 C1_Decaps3 C1_Decaps4 C1_Decaps5 C1_Decaps6 C1_Decaps7 C1_Decaps8 C1_Decaps9 C1_Decaps10 C1_Decaps11 C1_Decaps12 C1_Decaps13 C1_Decaps14 C1_Decaps15 C1_Decaps16 C1_Decaps17 C1_Decaps18 C1_Decaps19 C1_Decaps20 C1_Decaps21 C1_Decaps22 C1_Decaps23 C1_Decaps24 C1_Decaps25 C1_Decaps26: library part C0603C104K5RAC7411, "C0603C104K5RAC7411", Manufacturer_Name=KEMET, Mouser Part Number=80-C0603C104K5R7411, Arrow Part Number=C0603C104K5RAC7411, Arrow Price/Stock=https://www.arrow.com/en/products/c0603c104k5rac7411/kemet-corporation?region=nac, Datasheet Link=https://content.kemet.com/datasheets/KEM_C1002_X7R_SMD.pdf, Height=0.87mm, Manufacturer_Part_Number=C0603C104K5RAC7411, Mouser Price/Stock=https://www.mouser.co.uk/ProductDetail/KEMET/C0603C104K5RAC7411?qs=JxH5GSBHSCRTO9iUpWbJFg%3D%3D
J1: "Connector", Manufacturer_Name=Molex, Mouser Part Number=N/A, Arrow Part Number=0717640130, Arrow Price/Stock=https://www.arrow.com/en/products/0717640130/molex, Datasheet Link=https://www.molex.com/pdm_docs/sd/717640130_sd.pdf, Height=5.33mm, Manufacturer_Part_Number=0717640130, Mouser Price/Stock=https://www.mouser.com/Search/Refine.aspx?Keyword=N%2FA
J2_Package1 J2_Package2 J3_Package1 J3_Package2: "Connector", Manufacturer_Name="Adam Tech", Mouser Part Number=737-PH1-15-UA, Arrow Part Number=PH1-15-UA, Arrow Price/Stock=https://www.arrow.com/en/products/ph1-15-ua/adam-tech?region=nac, Datasheet Link=https://app.adam-tech.com/products/download/data_sheet/201605/ph1-xx-ua-data-sheet.pdf, Height=8.865mm, Manufacturer_Part_Number=PH1-15-UA, Mouser Price/Stock=https://www.mouser.co.uk/ProductDetail/Adam-Tech/PH1-15-UA?qs=HoCaDK9Nz5dUS47ZXPBTBg%3D%3D
R1_Resistors1 R1_Resistors2 R1_Resistors3 R1_Resistors4 R1_Resistors5 R1_Resistors6 R1_Resistors7 R1_Resistors8 R1_Resistors9 R1_Resistors10 R1_Resistors11 R1_Resistors12 R1_Resistors13 R1_Resistors14 R1_Resistors15 R1_Resistors16 R1_Resistors17 R1_Resistors18 R1_Resistors19 R1_Resistors20 R1_Resistors21 R1_Resistors22 R1_Resistors23 R1_Resistors24 R1_Resistors25 R1_Resistors26 R1_Resistors27 R1_Resistors28 R1_Resistors29 R1_Resistors30 R1_Resistors31 R1_Resistors32 R1_Resistors33 R1_Resistors34 R1_Resistors35 R1_Resistors36 R1_Resistors37 R1_Resistors38 R1_Resistors39 R1_Resistors40 R1_Resistors41 R1_Resistors42 R1_Resistors43 R1_Resistors44 R1_Resistors45 R1_Resistors46 R1_Resistors47 R1_Resistors48 R1_Resistors49 R1_Resistors50 R1_Resistors51 R1_Resistors52 R2_Resistors1 R2_Resistors2 R2_Resistors3 R2_Resistors4 R2_Resistors5 R2_Resistors6 R2_Resistors7 R2_Resistors8 R2_Resistors9 R2_Resistors10 R2_Resistors11 R2_Resistors12 R2_Resistors13 R2_Resistors14 R2_Resistors15 R2_Resistors16 R2_Resistors17 R2_Resistors18 R2_Resistors19 R2_Resistors20 R2_Resistors21 R2_Resistors22 R2_Resistors23 R2_Resistors24 R2_Resistors25 R2_Resistors26 R2_Resistors27 R2_Resistors28 R2_Resistors29 R2_Resistors30 R2_Resistors31 R2_Resistors32 R2_Resistors33 R2_Resistors34 R2_Resistors35 R2_Resistors36 R2_Resistors37 R2_Resistors38 R2_Resistors39 R2_Resistors40 R2_Resistors41 R2_Resistors42 R2_Resistors43 R2_Resistors44 R2_Resistors45 R2_Resistors46 R2_Resistors47 R2_Resistors48 R2_Resistors49 R2_Resistors50 R2_Resistors51 R2_Resistors52: library part RMCF0603FT1K00, "RMCF0603FT1K00", Manufacturer_Name="Stackpole Electronics", Mouser Part Number=708-RMCF0603FT1K00, Arrow Part Number=RMCF0603FT1K00, Arrow Price/Stock=https://www.arrow.com/en/products/rmcf0603ft1k00/stackpole-electronics?utm_currency=USD&region=nac, Datasheet Link=https://www.seielect.com/Catalog/SEI-RMCF_RMCP.pdf, Height=0.55mm, Manufacturer_Part_Number=RMCF0603FT1K00, Mouser Price/Stock=https://www.mouser.co.uk/ProductDetail/SEI-Stackpole/RMCF0603FT1K00?qs=FESYatJ8odI%252BYiPlprc1Pg%3D%3D

## Free pads (board coordinates)
  round 5.5 hole 3.4: 2(-135,-15) 2(-135,15) 2(-17,-30) 2(-17,30)

## Via types
v1: diameter 1.016, hole 0.508, Top Layer to Bottom Layer, tented both sides, 162 vias

## Nets (pads, with @x,y where several pads share a name; then routed paths per layer and width w, separated by ;. In a path a pad name is that pad's centre, name@x,y a point inside that pad or via, vN(x,y) a via of type N, cw(c..) or ccw(c..) an arc to the next point about the centre after c; other vN are vias at no path point)
Decap_In1: C1_Decaps1.1 J1.1 R1_Resistors1.1 R1_Resistors27.1 | length 87.4
  Top Layer w0.254: -23,-16.5 -20.834,-16.5 -20.084,-17.25 -20.084,-17.601 -19.935,-17.75 J1.1@-18.75,-17.75
  Top Layer w0.508: R1_Resistors1.1@-95.02,-19.5 v1(-95.02,-18) ; R1_Resistors27.1@-40,-19.75 -39.95,-19.75 -37.5,-17.3 v1(-37.5,-17.25) -36.75,-16.5 -23,-16.5
  Bottom Layer w0.254: J1.1@-18.75,-17.75 -18.052,-18.448 -18.052,-18.488 -16.007,-20.533 -15.517,-20.533 C1_Decaps1.1@-15.303,-20.747
  Bottom Layer w0.508: v1(-95.02,-18) -94.27,-17.25 v1(-37.5,-17.25)